# Altium PCB PCB1.PcbDoc (part 2 of 2)
Units mil, origin at the board's own origin, x right, y up, seen from the top; angles counter-clockwise.
Board outline 2955 x 1595 mil, 2 copper layers (Top Layer, Bottom Layer); 109 components, 71 nets, 326 pads, 182 vias.
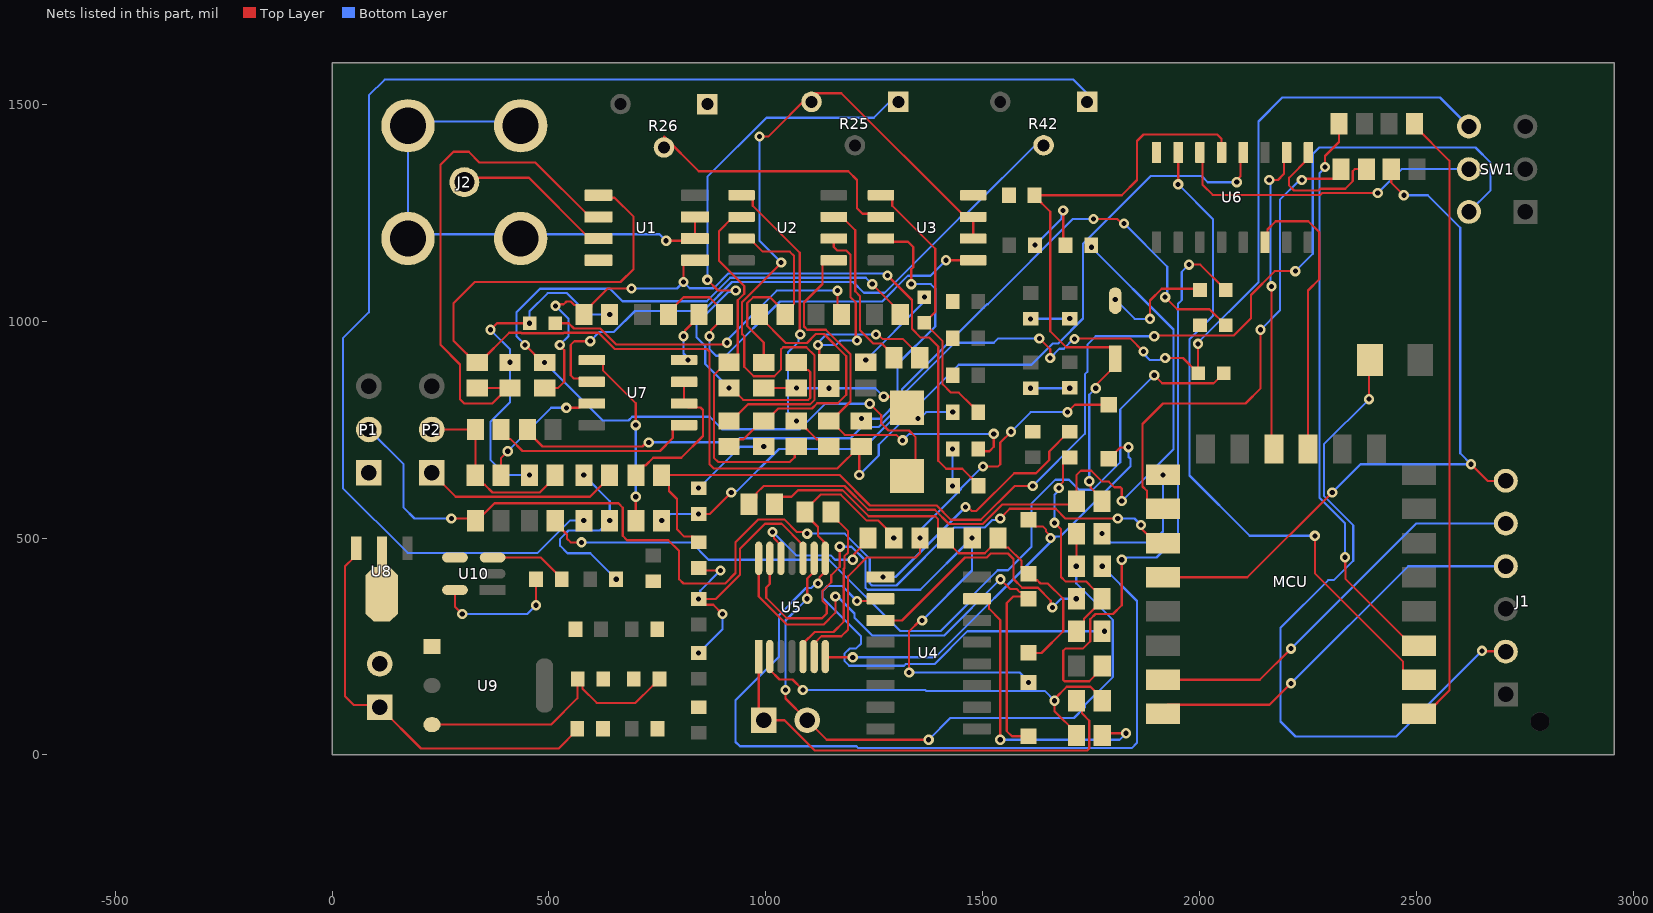
[diagram p2: the nets of this part, all layers, seen from the top]

## Via types
v1: diameter 23.62, hole 11.81, Top Layer to Bottom Layer, 182 vias

## Nets (pads, with @x,y where several pads share a name; then routed paths per layer and width w, separated by ;. In a path a pad name is that pad's centre, name@x,y a point inside that pad or via, vN(x,y) a via of type N, cw(c..) or ccw(c..) an arc to the next point about the centre after c; other vN are vias at no path point) (continued)
A_OUT: C30.1 R48.1 SW1.6 | length 2942.6
  Top Layer w5: C30.1@845,490 831.75,503.25 811.75,503.25 795,520 795,590 776.71,608.29 776.71,627.81 R48.1@759.53,645 1170,645 1240,575 1393.28,575 1426.18,542.11 1495.39,542.11 1573.28,620 v1(1615,620) ; v1(1895,965) 1896.75,966.75 2078.38,966.75 2117.69,1006.06 2117.69,1060 2172.69,1115 v1(2220,1115)
  Bottom Layer w5: v1(1615,620) 1735,740 1735,877.5 1740.69,883.19 1740.69,945.69 1760,965 v1(1895,965) ; v1(2220,1115) 2260,1155 2260,1385 2275,1400 2635,1400 2670,1365 2670,1301.5 SW1.6@2620.08,1251.57
ADC: MCU.2 U6.7 | length 1587.2
  Top Layer w5: v1(1950,1315) U6.7@1950,1388.35 ; v1(2265,505) 2265,418.57 2468.41,215.16 2468.41,194.27 2489.53,173.15 MCU.2@2505.28,173.15
  Bottom Layer w5: v1(1950,1315) 2030.36,1234.64 2030.36,1012.2 1976.16,958 1976.16,643.84 2115,505 v1(2265,505)
D_OUT: C29.1 LED_R1.2 R44.1 SW1.4 | length 2691.2
  Top Layer w5: R44.1@759.53,540 v1(760,540) ; v1(845,555) 870,555 v1(920,605) ; v1(1630,960) 1655,935 v1(1655,915) ; v1(1711.15,958.85) 1712.31,960 1839.31,960 1869.31,930 v1(1870,930) ; v1(1920,915) 1960.94,915 1995.48,880.47 v1(1995.48,947.44)
  Bottom Layer w5: v1(760,540) 764.44,540 779.44,555 v1(845,555) ; v1(920,605) 923.56,608.56 933.56,608.56 1030,705 1223.28,705 1323.35,805.07 1323.35,838.35 1435,950 1525,950 1535,960 v1(1630,960) ; v1(1655,915) 1676.24,936.24 1686.24,936.24 1708.85,958.85 v1(1711.15,958.85) ; v1(1870,930) 1870,925 1885,910 1907.76,910 1909.2,911.44 1916.44,911.44 v1(1920,915) ; v1(1995.48,947.44) 1995.48,950 2135,1089.53 2135,1460 2190,1515 2553.5,1515 SW1.4@2620.08,1448.43
DOUT: C4.1 LED_R.2 U3.1 | length 635.3
  Top Layer w5: U3.1@1265,1290 1281.69,1290 1291,1280.69 1291,1265.75 1390,1166.75 1390,1020.94 LED_R.2@1365,995.94 1407.22,953.72 1407.22,854.18 1426.4,835 1444.53,835 1474.31,805.22 1476.28,805.22 1489.53,791.97 C4.1@1489.53,790
DTR: J1.6 MCU.18 R3.2 | length 1712.1
  Top Layer w5: MCU.18@1914.72,409.37 2109.37,409.37 v1(2305,605) ; R3.2@2440.94,1350 2440.94,1319.06 v1(2470,1290) ; v1(2625,670) 2663.94,631.06 J1.6@2714.33,631.06
  Bottom Layer w5: v1(2305,605) 2370,670 v1(2625,670) 2600,694.96 2600,1215 2525,1290 v1(2470,1290)
GND: C1.1 C2.2 C3.1 C4.2 C5.2 C6.2 C7.2 C8.2 C10.1 C11.2 C12.2 C13.2 C14.2 C15.2 C16.2 C17.2 C18.2 C19.2 C20.2 C21.2 C22.2 C24.2 C25.2 C26.2 C27.2 C28.2 C29.2 C30.2 D1.2 D6.2 J1.2 LED_G.2 LED_R2.2 LED_R3.2 MCU.15 P1.1 P3.2 R4.2 R6.1 R8.2 R10.1 R13.1 R15.1 R16.1 R19.1 R26.1 R33.1 R43.1 R46.2 R47.2 U1.4 U3.8 U5.10 U6.1 U6.8 U7.8 U8.2 U9.1 U10.4 | length 5656.1
  Top Layer w5: v1(365,980) 380,995 v1(455,995) ; v1(580,645) R47.2@580.47,645 ; R8.2@639.53,1015 v1(640,1015) ; v1(810,965) 813.56,968.56 813.56,978.17 845.47,1010.08 R10.1@845.47,1015 ; C30.2@845,430.94 850.94,425 v1(895,425) ; C29.2@845,614.53 v1(845,615) ; v1(900,325) 878.72,346.28 858.25,346.28 v1(845,359.53) 884.53,359.53 940,415 940,475 997.89,532.89 1036.11,532.89 1085.59,483.41 U5.10@1085.59,453.2 ; R13.1@995,845.47 v1(1070,845.47) ; v1(1271.42,825.69) 1299.31,825.69 D1.2@1325,800 v1(1350,775) ; v1(1430,705) C3.1@1430.47,705 ; v1(1610,845) C10.1@1610,845.47 ; v1(1610,1005) C12.2@1610,1005.47 ; v1(1685,1255) 1685,1180.47 C15.2@1690.47,1175 ; v1(1885,1005) 1885,1047.31 1912,1074.31 1997.83,1074.31 LED_R3.2@2000.47,1071.67 ; MCU.15@1914.72,645.59 1914.72,645.28 v1(1915,645) ; U6.1@2250,1388.35 2250,1374.57 2205.69,1330.26 2205.69,1312 2217,1300.69 2273.79,1300.69 2278.11,1305 2334.9,1305 2352.33,1322.43 2352.33,1345.46 2356.87,1350 R4.2@2384.06,1350 ; v1(2390,820) 2390,908.12 C1.1@2391.88,910 ; v1(2650,240) 2650.93,239.07 2704.07,239.07 J1.2@2705,238.15
  Bottom Layer w5: v1(365,980) 410,935 v1(410,905) 410,812.48 365,767.48 365,680 400,645 v1(455,645) ; v1(455,995) 455,1022.31 497,1064.31 541.33,1064.31 590.64,1015 v1(640,1015) ; v1(580,645) 640,585 v1(640,540) 617.22,517.22 544.91,517.22 525.69,498 525.69,482 542.69,465 595,465 v1(655,405) ; v1(810,965) 810,925.04 820,915.04 v1(820,910) ; v1(845,235) 900,290 v1(900,325) ; v1(845,359.53) 848.56,363.09 848.56,378.56 v1(895,425) ; v1(845,615) 940.47,710.47 v1(995,710.47) ; v1(1070,845.47) 1070.24,845.24 1144.76,845.24 v1(1145,845) 1252.11,845 v1(1271.42,825.69) ; v1(1350,775) 1354.44,775 1369.44,790 v1(1430.47,790) ; v1(1430,620) v1(1430,705) ; v1(1610,845) v1(1700,845) ; v1(1610,1005) 1610.24,1005.24 1699.76,1005.24 v1(1700,1005.47) ; v1(1620,1175) 1681.44,1236.44 1681.44,1251.44 v1(1685,1255) ; v1(1774.53,510) 1794.53,490 1890,490 1915,515 v1(1915,645) ; v1(1805,1050) 1850,1005 v1(1885,1005) ; v1(2390,820) 2285.69,715.69 2285.69,597 2353.59,529.11 2353.59,447.73 2308.72,402.86 2295.55,402.86 2185.69,293 2185.69,77 2220.21,42.48 2452.48,42.48 v1(2650,240)
IN1: P4.1 R28.2 U5.1 | length 1078.8
  Top Layer w5: U5.1@983.23,226.8 983.23,91.77 P4.1@995,80 1042.64,80 1112.26,10.37 1740.37,10.37 1745,15 1745,79.06 1728.23,95.82 1728.23,112.71 R28.2@1715.94,125 R28.2@1733.13,107.81
NetC2_1: C2.1 R7.1 R8.1 U1.5 | length 1766.7
  Top Layer w5: R7.1@490,845.47 520.47,845.47 535,860 535,932.76 525,942.76 v1(525,945) ; v1(515,1035) 518.56,1038.56 533.82,1038.56 540.26,1045 550.47,1045 558.37,1037.11 563.29,1037.11 580.47,1019.92 R8.1@580.47,1015 597.66,1032.19 597.66,1037.11 635.55,1075 v1(690,1075) ; v1(810,1090) 810,1129.7 820.3,1140 U1.5@836.22,1140 ; v1(1280,1105) 1336.71,1048.29 1336.71,982.13 1357.11,961.74 1376.83,961.74 1397.22,941.34 1397.22,677.78 1415.3,659.7 1452.27,659.7 1490,621.97 C2.1@1490,620
  Bottom Layer w5: v1(515,1035) 545,1005 545,965 v1(525,945) ; v1(690,1075) 795,1075 v1(810,1090) 824.31,1075.69 879.49,1075.69 913.61,1109.81 1270.15,1109.81 1274.96,1105 v1(1280,1105)
NetC3_2: C3.2 R18.2 U2.5 | length 973.2
  Top Layer w5: R18.2@1145,769.53 R18.2@1149.92,769.53 ; U2.5@1156.3,1140 1139.61,1140 1130.3,1130.69 1130.3,1085.19 1087.81,1042.71 1087.81,987.29 1095.1,980 1138.1,980 1195,923.1 1195,814.61 R18.2@1149.92,769.53 ; v1(1315,725) 1313.01,725 1300.35,737.66 1181.79,737.66 R18.2@1149.92,769.53 ; C3.2@1489.53,705 1494.53,700 1515,700 1525,710 v1(1525,740)
  Bottom Layer w5: v1(1315,725) 1330,740 v1(1525,740)
NetC9_1: C9.1 R30.2 R31.2 | length 514.9
  Top Layer w5: v1(1665,535) 1680,520 1680,410 1690,400 1737.44,400 1755.34,382.11 1757.34,382.11 1774.53,364.92 R31.2@1774.53,360 1774.53,355.08 1732.66,313.21 1732.66,302.19 R30.2@1715.47,285 ; v1(1675,615) 1675,620.04 1684.78,629.82 1684.78,672.22 1698.03,685.47 C9.1@1700,685.47
  Bottom Layer w5: v1(1665,535) 1665,599.96 1675,609.96 v1(1675,615)
NetC9_2: C9.2 U4.9 | length 587.8
  Top Layer w5: v1(1460,571.42) 1465.04,571.42 1474.35,562.11 1485,562.11 1572.2,649.31 1622.44,649.31 1652.7,679.58 1652.7,699.2 1698.03,744.53 C9.2@1700,744.53
  Bottom Layer w5: v1(1270,410) 1298.58,410 v1(1460,571.42)
NetC15_1: C15.1 R34.1 R39.2 | length 1770.5
  Top Layer w5: R34.1@960.94,575 977.92,591.98 977.92,602.92 995,620 1180.86,620 1235.86,565 1389.14,565 1422.04,532.11 1499.53,532.11 1544.65,577.22 1707.7,577.22 R39.2@1715.47,585 1715.47,644.72 1725.75,655 1750,655 1775,630 1790,630 1802.89,617.11 1817.07,617.11 1820,614.18 v1(1820,585) ; C15.1@1749.53,1175 1750,1174.53 v1(1750,1170)
  Bottom Layer w5: v1(1750,1170) 1939.31,980.69 1939.31,704.31 v1(1820,585)
NetC16_1: C16.1 D6.1 R39.1 U6.5 | length 1455.7
  Top Layer w5: v1(1745,630.69) 1748.56,627.13 1748.56,615.89 1774.53,589.92 R39.1@1774.53,585 ; v1(1760,845) 1763.56,848.56 1763.56,855.58 1805,897.01 1805,927.42 1792.88,939.53 1691.92,939.53 1655,976.45 1655,1252.09 1619.06,1288.03 C16.1@1619.06,1290 1820,1290 1855,1325 1855,1415 1870,1430 2040,1430 2050,1420 U6.5@2050,1388.35
  Bottom Layer w5: v1(1745,630.69) 1745,830 v1(1760,845)
NetC17_1: C17.1 P3.1 U8.3 | length 957
  Top Layer w5: U8.3@55.94,476.3 55.94,475.94 50,470 50,454.61 30,434.61 30,135 50,115 105,115 P3.1@110,110 205,15 522.44,15 565.47,58.03 C17.1@565.47,60
NetC23_1: C23.1 U10.5 | length 300.4
  Top Layer w5: U10.5@283.35,380.2 283.35,341.65 v1(300,325) ; v1(470,345) C23.1@470,405
  Bottom Layer w5: v1(300,325) 450,325 v1(470,345)
NetC23_2: C23.2 U10.3 | length 180.9
  Top Layer w5: U10.3@370,455 481.02,455 529.06,406.97 C23.2@529.06,405
NetD1_1: D1.1 R7.2 R23.1 | length 2215.6
  Top Layer w5: v1(445,945) 445,944.61 485.08,904.53 v1(490,904.53) ; v1(1239.31,809.45) 1265.61,783.15 1265.61,764.39 1282.34,747.66 1329.65,747.66 1344.31,733 1344.31,661.83 D1.1@1325,642.52 ; v1(1245,1085) 1245,1084.45 1309.53,1019.92 R23.1@1309.53,1015
  Bottom Layer w5: v1(445,945) 425,965 425,1020 479.31,1074.31 640.69,1074.31 669.31,1045.69 863.64,1045.69 917.75,1099.81 1230.19,1099.81 v1(1245,1085) ; v1(490,904.53) 623.84,770.69 683.38,770.69 692,779.31 870.69,779.31 899.31,750.69 1078,750.69 1136.76,809.45 v1(1239.31,809.45)
NetD2_1: D2.1 D5.2 U5.7 | length 1069.2
  Top Layer w5: U5.7@1136.77,226.8 1138.57,225 v1(1200,225) ; D2.1@1605,542.01 1620.22,526.79 1638.21,526.79 1645.05,519.95 1645.05,515.67 1655.69,505.04 v1(1655.69,500) ; D5.2@1790,682.99 1790.98,682.99 1816.38,708.39 1834.66,708.39 v1(1835.69,709.42)
  Bottom Layer w5: v1(1200,225) 1390,225 v1@1660.34,495.34 ; v1(1655.69,500) v1@1660.34,495.34 ; v1(1835.69,709.42) 1835.69,686.84 1840,682.53 1840,665 1678.56,503.56 1668.56,503.56 1665,500 v1@1660.34,495.34
NetD2_2: D2.2 D3.2 R34.2 R37.1 R38.1 | length 1017.2
  Top Layer w5: R34.2@1020,575 R34.2@1020,577.81 1037.19,595 1059.06,595 1074.06,610 1176.72,610 1236.72,550 1390,550 1396.87,543.13 1396.87,517.19 R37.1@1414.06,500 1414.06,495.08 1444.13,465 1504.45,465 R38.1@1534.53,495.08 ; R38.1@1534.53,500 R38.1@1534.53,495.08 ; D3.2@1605,235.98 1605.98,235 1635,235 1685,285 1685,360 1649.78,395.22 1632.78,395.22 1625.23,402.78 1621.2,402.78 1605.98,417.99 1604.02,417.99 1588.8,433.21 1588.8,447.65 1558.56,477.89 1551.71,477.89 R38.1@1534.53,495.08
NetD3_1: D3.1 D4.2 U5.14 | length 1299.9
  Top Layer w5: U5.14@983.23,453.2 983.23,365.32 1047.86,300.69 1133,300.69 1160,327.69 v1(1160,365) ; v1(1540.3,404.7) 1562.22,382.78 1577.22,382.78 1584.77,375.22 1588.8,375.22 D3.1@1599.02,365 ; D4.2@1605,42.99 1567.01,42.99 1555,55 1555,350 1570,365 D3.1@1599.02,365 ; D3.1@1605,360 1600,365 D3.1@1599.02,365
  Bottom Layer w5: v1(1160,365) 1165,365 1203.94,326.06 1203.94,316.06 1244.31,275.69 1411.28,275.69 v1(1540.3,404.7)
NetD4_1: D4.1 R38.2 U5.13 | length 1523.5
  Top Layer w5: U5.13@1008.82,453.2 1008.82,393.89 1000.69,385.76 1000.69,362 1047.69,315 1129.18,315 1140,325.82 1140,345.53 1130.69,354.84 1130.69,378.38 1150.34,398.03 1150.34,414.25 1170,433.9 v1(1170,480) ; v1(1330,190) 1330,285 1355,310 v1(1360,310)
  Bottom Layer w5: v1(1170,480) 1197.31,480 1229.37,447.94 1229.37,385.63 1234.31,380.69 1355.69,380.69 v1(1475,500) 1475,425 v1(1360,310) ; v1(1330,190) 1585,190 1605,170 v1(1605,167.01)
NetD5_1: D5.1 R37.2 U5.6 | length 1070.2
  Top Layer w5: U5.6@1111.18,226.8 1111.18,257.01 1127.75,273.57 1173.57,273.57 1189.31,289.31 1189.31,412 1232.31,455 1345,455 1355,465 v1(1355,500) ; v1(1500,665) 1535,665 1540,670 1540,720 v1(1565,745) ; v1(1695,790) 1712.01,807.01 D5.1@1790,807.01
  Bottom Layer w5: v1(1355,500) 1358.56,503.56 1358.56,521.25 1449.31,612 1449.31,614.31 v1(1500,665) ; v1(1565,745) 1610,790 v1(1695,790)
NetLED_G_1: LED_G.1 R20.1 | length 784.1
  Top Layer w5: LED_G.1@514.52,995 545.58,995 557.68,982.89 618.26,982.89 655.46,945.69 897.76,945.69 898.51,946.44 906.44,946.44 v1(910,950) ; v1(1165,1070) 1165,1024.06 R20.1@1174.06,1015
  Bottom Layer w5: v1(910,950) 910,955 1025,1070 v1(1165,1070)
NetLED_R1_1: LED_R1.1 R41.2 | length 2069.5
  Top Layer w5: R41.2@514.53,540 514.53,535.08 541.44,508.17 541.44,498.56 550,490 v1(575,490) ; v1(1895,875) 1913.25,856.75 2031.75,856.75 LED_R1.1@2055,880
  Bottom Layer w5: v1(575,490) 827.52,490 867.52,450 1145,450 1309.31,285.69 1403,285.69 1468.48,351.17 1468.48,360.2 1533.97,425.69 1558,425.69 1611.66,479.35 1611.66,578.97 1667,634.31 1698.53,634.31 1721.47,611.38 1753,611.38 1816.38,674.76 1816.38,796.38 v1(1895,875)
NetLED_R2_1: LED_R2.1 R50.2 | length 2015.7
  Top Layer w5: R50.2@450.47,750 450.47,745.08 484.86,710.69 715.65,710.69 724.96,720 v1(730,720) ; v1(1755,1235) 1809.96,1235 1819.96,1225 v1(1825,1225) ; v1(1920,1055) 1947.66,1027.34 2022.18,1027.34 LED_R2.1@2059.52,990
  Bottom Layer w5: v1(730,720) 730.47,720.47 930.47,720.47 939.78,729.78 1194.78,729.78 1220.69,755.69 1259.83,755.69 1313.35,809.21 1313.35,842.49 1509.6,1038.75 1511.06,1038.75 1707.31,1235 v1(1755,1235) ; v1(1825,1225) 1925,1125 1925,1057.93 1922.07,1055 v1(1920,1055)
NetLED_R3_1: LED_R3.1 R29.1 | length 1385.7
  Top Layer w5: R29.1@1775,205 1775,200.08 1744.92,170 1687.93,170 1685,172.93 1685,240 1690,245 1730.37,245 1747.34,261.97 1747.34,312.71 1759.63,325 1800,325 1820,345 v1(1820,450) ; v1(1975,1130) 2001.2,1130 LED_R3.1@2059.52,1071.67
  Bottom Layer w5: v1(1820,450) 1823.56,453.56 1830.8,453.56 1832.24,455 1900,455 1949.31,504.31 1949.31,1039.31 1958.22,1048.22 1958.22,1113.22 v1(1975,1130)
NetLED_R_1: LED_R.1 R21.2 | length 205.9
  Top Layer w5: R21.2@1230,905 v1(1230,910)
  Bottom Layer w5: v1(1230,910) 1361.44,1041.44 1361.44,1051.44 v1(1365,1055)
NetMCU_3: MCU.3 R2.1 | length 1326
  Top Layer w5: v1(2288.5,1355) 2288.5,1380.48 2320.47,1412.45 R2.1@2320.47,1455 ; v1(2334.27,455.73) 2335,455 2335,427.31 2335.24,427.07 2335.24,406.18 2489.53,251.89 MCU.3@2505.28,251.89
  Bottom Layer w5: v1(2288.5,1355) 2288.5,1353.32 2275.69,1340.51 2275.69,592.86 2334.27,534.27 v1(2334.27,455.73)
NetMCU_16: MCU.16 R4.1 | length 1156.3
  Top Layer w5: MCU.16@1914.72,566.85 1898.98,566.85 1877.85,587.97 1877.85,608.86 1867.85,618.86 1867.85,762.85 1915,810 2105,810 2140,845 v1(2140,980) ; v1(2235,1325) 2237.89,1327.89 2307.81,1327.89 2325,1345.08 R4.1@2325,1350
  Bottom Layer w5: v1(2140,980) 2184.31,1024.31 2184.31,1279.31 2230,1325 v1(2235,1325)
NetMCU_17: MCU.17 P1.2 R40.2 | length 2456.6
  Top Layer w5: v1(275,545) R40.2@325.47,545 ; R40.2@330.47,540 R40.2@325.47,545 ; v1(1095,510) 1091.44,513.56 1071.44,513.56 1042.11,542.89 982.89,542.89 930,490 930,419.14 905.86,395 810,395 800,405 800,470 775,495 680,495 670,505 670,570 660,580 374.63,580 339.63,545 R40.2@325.47,545 ; v1(1539.87,545.13) 1561.96,567.22 1667.78,567.22 1690,545 v1(1810.69,545) ; v1(1864.31,530) 1867.87,526.44 1867.87,519.21 1898.98,488.11 MCU.17@1914.72,488.11
  Bottom Layer w5: P1.2@85,750 165,670 165,570 190,545 v1(275,545) ; v1(1095,510) 1181.45,510 1239.37,452.09 1239.37,395.63 1244.31,390.69 1300.69,390.69 1434.31,524.31 1504.31,524.31 1521.57,541.57 1536.3,541.57 v1(1539.87,545.13) ; v1(1810.69,545) 1849.31,545 v1(1864.31,530)
NetP2_1: P2.1 R47.1 | length 455.9
  Top Layer w5: P2.1@230,650 285,595 594.45,595 639.53,640.08 R47.1@639.53,645
NetP2_2: P2.2 R45.2 R46.1 R49.2 | length 428.6
  Top Layer w5: P2.2@230,750 R49.2@330.47,750 330.47,645.47 R45.2@330,645 330,640.08 347.19,622.89 352.11,622.89 370,605 478.98,605 514.06,640.08 R46.1@514.06,645
NetP4_2: P4.2 R32.2 R33.2 U5.9 | length 1572.1
  Top Layer w5: v1(1045,150) 1045,130 P4.2@1095,80 1140,35 v1(1375,35) ; v1(1095,360) 1095,406.81 1111.18,422.99 U5.9@1111.18,453.2 ; R32.2@1715.47,435.47 R33.2@1715.47,510
  Bottom Layer w5: v1(1045,150) 1045,310 v1(1095,360) ; v1(1375,35) 1425,85 1710,85 1735,110 1735,115 1799.31,179.31 1799.31,311.33 1715,395.64 v1(1715,435)
NetR5_1: R5.1 R6.2 U1.2 | length 1196
  Top Layer w5: R5.1@335,845.47 405.08,845.47 369.61,810 305,810 295,820 295,900 250,945 250,1360 280,1390 315,1390 340,1365 469.09,1365 594.09,1240 U1.2@613.78,1240
NetR9_1: R9.1 R10.2 U3.5 | length 967.7
  Top Layer w5: R9.1@775,1015 775,1019.92 810.08,1055 869.45,1055 904.53,1019.92 R10.2@904.53,1015 904.53,1010.08 873.56,979.11 873.56,968.56 v1(870,965) ; v1(1415,1140) U3.5@1477.6,1140
  Bottom Layer w5: v1(870,965) 870,935 885,920 907.5,920 1032.5,1045 1267.69,1045 1327,1104.31 1379.31,1104.31 v1(1415,1140)
NetR11_1: R11.1 R14.1 R15.2 | length 667.5
  Top Layer w5: R14.1@915,710.47 932.19,727.66 948.21,727.66 990.08,769.53 999.92,769.53 1028.68,798.29 1106,798.29 1118.21,810.5 1165.4,810.5 1185,830.1 1185,918.95 1133.95,970 1115,970 1094.57,949.57 1045.99,949.57 985.47,1010.08 R11.1@985.47,1015
NetR11_2: R11.2 R13.2 U2.3 | length 541.8
  Top Layer w5: U2.3@943.7,1190 962.4,1190 992.4,1160 1055,1160 1065,1150 1065,1095.2 1065,1040.04 1062.07,1037.11 1061.71,1037.11 R11.2@1044.53,1019.92 ; R13.2@995,904.53 995,950.57 957.11,988.47 957.11,1041.53 970.57,1055 1009.45,1055 R11.2@1044.53,1019.92 ; R11.2@1044.53,1015 R11.2@1044.53,1019.92
NetR12_1: R12.1 R16.2 R25.1 | length 1439.1
  Top Layer w5: v1(865,1095) 889.5,1070.5 v1(930.48,1070.5) ; v1(915,845.94) 919.92,845.94 947.58,818.29 1097.71,818.29 1102.11,822.68 1102.11,882.7 1097.47,887.34 1087.19,887.34 R16.2@1070,904.53
  Bottom Layer w5: v1(865,1095) 865,1332.31 1001.13,1468.44 1248.44,1468.44 R25.1@1305,1525 ; v1(915,845.94) 860,900.94 860,942.5 840,962.5 840,1000 853.23,1013.23 859.46,1013.23 913.16,1066.93 926.91,1066.93 v1(930.48,1070.5)
NetR12_2: R12.2 R17.1 U2.2 | length 866.1
  Top Layer w5: U2.2@943.7,1240 925,1240 891.54,1206.54 891.54,1139.41 950,1080.95 950,1062.71 935,1047.71 935,922.19 917.81,905 R12.2@915,905 910.08,905 880,874.92 880,685 890,675 1055,675 1066.22,686.22 1066.22,706.69 R17.1@1070,710.47
NetR14_2: R14.2 R25.3 U3.6 U3.7 | length 1845.9
  Top Layer w5: R14.2@915,769.53 919.92,769.53 958.68,808.29 1101.86,808.29 1112.11,818.54 1112.11,920.58 1093.12,939.57 1039.57,939.57 1035,935 1035,888.59 1019.07,872.66 971.97,872.66 950,894.63 950,965 945,970 945,1043.57 1035,1133.57 v1(1035,1135) ; v1(985,1425) 1005,1425 1105,1525 1173.9,1525 1458.9,1240 U3.7@1477.6,1240 U3.6@1477.6,1190
  Bottom Layer w5: v1(985,1425) 985,1185 v1(1035,1135)
NetR17_2: R17.2 R18.1 U2.1 | length 700
  Top Layer w5: U2.1@943.7,1290 960.39,1290 969.7,1280.69 969.7,1265.75 1077.81,1157.64 1077.81,969.98 v1(1078.92,968.88) ; R17.2@1074.92,769.53 1116.79,727.66 1127.81,727.66 R18.1@1145,710.47
  Bottom Layer w5: v1(1070,770) 1050.69,789.31 1050.69,927.75 1075.35,952.42 1075.35,965.31 v1(1078.92,968.88)
NetR19_2: R19.2 R24.1 U2.6 | length 690.4
  Top Layer w5: v1(1120,945) 1122.89,942.11 1122.89,921.24 1140.08,904.06 R19.2@1145,904.06 ; U2.6@1156.3,1190 1156.3,1170.69 1164.77,1162.22 1185.84,1162.22 1195,1153.05 1195,1055 1206.93,1043.07 1206.93,958.07 v1(1210,955) ; v1(1253.83,968.86) 1258.87,968.86 1269.5,958.23 1316.22,958.23 1354.53,919.92 R24.1@1354.53,915
  Bottom Layer w5: v1(1210,955) 1171.78,955 1161.78,945 v1(1120,945) 1120,950 1138.86,968.86 v1(1253.83,968.86)
NetR22_2: R22.2 U3.3 | length 625.7
  Top Layer w5: U3.3@1265,1190 1272.3,1182.7 1327.3,1182.7 1329.98,1180.02 1339.31,1170.69 1339.31,1123.67 1335,1119.36 v1(1335,1085)
  Bottom Layer w5: v1(1220,775) 1265,775 1303.35,813.35 1303.35,900.85 1390,987.5 1390,1075 1380,1085 v1(1335,1085)
NetR26_2: R26.2 U3.2 | length 614.8
  Top Layer w5: 765,1425.2 845.2,1345 1190,1345 1210,1325 1210,1260 1222.7,1247.3 1257.7,1247.3 U3.2@1265,1240
NetR27_2: R27.2 R28.1 U5.2 | length 958.9
  Top Layer w5: U5.2@1008.82,226.8 1008.82,196.59 1031.44,173.97 1061.03,173.97 v1(1085,150) ; R27.2@1715.94,45 1715.94,49.92 1665,100.87 1665,128.95 1693.15,157.11 1747.81,157.11 1775,129.92 R28.1@1775,125
  Bottom Layer w5: v1(1085,150) 1366.8,150 1369.1,147.7 1642.3,147.7 v1(1665,125)
NetR30_1: R30.1 U4.10 | length 1018.6
  Top Layer w5: v1(1210,355) 1258.78,355 U4.10@1263.78,360 ; R30.1@1774.53,285 v1(1780,285)
  Bottom Layer w5: v1(1210,355) 1175.69,389.31 1142,389.31 1130.69,378 1130.69,361.81 1219.31,273.19 1219.31,257 1207.31,245 1192.69,245 1180.69,233 1180.69,217 1192,205.69 1318.38,205.69 1322,209.31 1388.45,209.31 1464.14,285 v1(1780,285)
NetR31_1: R31.1 U4.11 | length 609.1
  Top Layer w5: U4.11@1263.78,310 1313.55,310 1458.55,455 1508.59,455 1517.9,464.31 1558,464.31 1570.6,451.71 1570.6,405.37 1590.75,385.22 1626.81,385.22 1656.44,355.59 1656.44,343.56 v1(1660,340)
  Bottom Layer w5: v1(1660,340) 1680,360 v1(1715,360)
NetR32_1: R32.1 R35.2 R36.2 U5.8 | length 2295.7
  Top Layer w5: v1(1120,395) 1123.56,398.56 1123.56,409.79 1133.64,419.86 1136.77,419.86 U5.8@1136.77,453.2 1136.77,486.54 1133.02,490.3 1133.02,491.98 1120,505 1120,525.55 1090.47,555.08 R35.2@1090.47,560 1090.47,564.92 1125.55,600 1172.57,600 1232.57,540 1259.45,540 1294.53,504.92 v1(1294.53,500) ; v1(1775,435) R32.1@1775,439.92
  Bottom Layer w5: v1(1120,395) 1114.96,395 1104.68,384.72 1092.41,384.72 1030,322.31 1030,226.15 930,126.15 930,30 940,20 1208.62,20 1212.93,15.69 1842.76,15.69 1855,27.93 1855,355 v1(1775,435)
NetR35_1: R35.1 U5.5 | length 418.1
  Top Layer w5: U5.5@1085.59,226.8 1085.59,257.01 1112.16,283.57 1155.64,283.57 1179.31,307.24 1179.31,429.07 1180.69,430.45 1180.69,458 1189.31,466.62 1189.31,515.3 1149.53,555.08 R35.1@1149.53,560
NetR36_1: R36.1 U5.12 | length 344.4
  Top Layer w5: v1(1015,513.58) 1018.56,510.02 1018.56,499.26 1034.41,483.41 U5.12@1034.41,453.2 ; v1(1200,450) 1203.56,453.56 1203.56,463.17 1235.47,495.08 R36.1@1235.47,500
  Bottom Layer w5: v1(1015,513.58) 1016.42,513.58 1070,460 1149.14,460 1159.14,450 v1(1200,450)
NetR42_1: R42.1 R43.2 | length 3260.5
  Bottom Layer w5: v1(580,540) 548.14,540 473.83,465.69 174.31,465.69 25,615 25,960 85,1020 85,1520 121.32,1556.32 1708.68,1556.32 R42.1@1740,1525
NetR42_2: R42.2 U7.2 | length 1434.3
  Top Layer w5: v1(595,953.58) 558.58,953.58 550,945 550,875 557.7,867.3 591.4,867.3 U7.2@598.7,860
  Bottom Layer w5: v1(595,953.58) 616.42,975 650,975 698.23,1023.23 855.32,1023.23 921.9,1089.81 1200.82,1089.81 1225.63,1065 1273.55,1065 1446.65,1238.1 1453.1,1238.1 R42.2@1640,1425
NetR44_2: R44.2 U7.1 | length 421.9
  Top Layer w5: U7.1@598.7,910 615.39,910 624.7,900.69 624.7,885.75 700,810.45 v1(700,760) ; v1(700,595) 700,540.47 R44.2@700.47,540
  Bottom Layer w5: v1(700,595) v1(700,760)
NetR45_1: R45.1 U7.3 | length 300.9
  Top Layer w5: R45.1@389.06,645 389.06,684.06 v1(405,700) ; v1(540,800) 567.76,800 568.45,800.69 570.69,800.69 580,810 U7.3@598.7,810
  Bottom Layer w5: v1(405,700) 505,800 v1(540,800)
NetR48_2: R48.2 U7.6 U7.7 | length 354.6
  Top Layer w5: R48.2@700.47,645 700.47,649.92 717.66,667.11 722.58,667.11 740.47,685 805,685 855,735 855,795 849.31,800.69 820.61,800.69 U7.6@811.3,810 U7.7@811.3,860
NetR49_1: R49.1 U7.5 | length 481.6
  Top Layer w5: R49.1@389.53,750 389.53,745.08 406.71,727.89 411.63,727.89 438.84,700.69 755.69,700.69 785.3,730.3 785.3,750.69 794.61,760 U7.5@811.3,760
p_AOUT: R5.2 R22.1 U1.1 U6.4 | length 3468.4
  Top Layer w5: U1.1@613.78,1290 619.61,1284.17 650.83,1284.17 695,1240 695,1120 665,1090 329.21,1090 279.61,1040.39 279.61,955 309.61,925 309.96,925 312.89,922.07 312.89,921.71 330.08,904.53 339.92,904.53 408.29,972.89 435.47,972.89 436.61,971.75 533.38,971.75 534.52,972.89 614.11,972.89 651.32,935.69 864.31,935.69 870,930 870,670 880,660 1164.61,660 1215.08,710.47 R22.1@1220,710.47 1215,705.47 v1(1215,645) ; v1(2085,1320) 2085,1325.04 2093.62,1333.66 2093.62,1381.97 U6.4@2100,1388.35
  Bottom Layer w5: v1(1215,645) 1260,690 1260,715 1444.31,899.31 1612,899.31 1661.08,948.39 1673.39,948.39 1730.69,1005.69 1730.69,1178 1887,1334.31 2003.83,1334.31 2018.14,1320 v1(2085,1320)
PH+: J2.1 U1.3 | length 366.9
  Top Layer w5: J2.1@304.92,1330.08 454.02,1330.08 594.09,1190 U1.3@613.78,1190
PH-: J2.2 J2.3 J2.4 J2.5 U1.6 U1.7 | length 1239.3
  Top Layer w5: v1(770,1185) 831.22,1185 U1.6@836.22,1190 U1.7@836.22,1240
  Bottom Layer w5: J2.2@434.84,1460 175,1460 175,1200.16 434.84,1200.16 754.84,1200.16 v1(770,1185)
PIN7: R27.1 U4.7 | length 711
  Top Layer w5: U4.7@1486.22,360 1503.99,360 1514.28,349.7 1514.28,336.7 1540,310.98 v1(1540,35) ; R27.1@1775,45 1780,50 v1(1830,50)
  Bottom Layer w5: v1(1540,35) 1815,35 v1(1830,50)
RST: MCU.1 R1.2 | length 1432
  Top Layer w5: R1.2@2494.53,1455 2494.53,1450.08 2575,1369.61 2575,148.39 2521.02,94.41 MCU.1@2505.28,94.41
RX: J1.5 MCU.21 | length 939.5
  Top Layer w5: MCU.21@1914.72,173.15 2138.15,173.15 v1(2210,245)
  Bottom Layer w5: v1(2210,245) 2498.43,533.43 J1.5@2705,533.43
S0: MCU.11 U6.14 | length 680
  Top Layer w5: U6.14@2150,1181.65 2155.78,1187.43 2155.78,1210.78 2175,1230 2250,1230 2275,1205 2275,1096.08 2249.37,1070.45 MCU.11@2249.37,704.65
S1: MCU.12 U6.2 | length 716.4
  Top Layer w5: v1(2160,1325) 2179.96,1325 2193.62,1338.66 2193.62,1381.97 U6.2@2200,1388.35 ; v1(2165,1080) 2165,710.28 MCU.12@2170.63,704.65
  Bottom Layer w5: v1(2160,1325) 2162.5,1322.5 2162.5,1082.5 v1(2165,1080)
Senser_OUT: SW1.5 U6.6 | length 725.1
  Top Layer w5: U6.6@2000,1388.35 2006.38,1381.97 2006.38,1313.62 2029.31,1290.69 2277.94,1290.69 2282.25,1295 v1(2410,1295)
  Bottom Layer w5: v1(2410,1295) 2465,1350 SW1.5@2620.08,1350
t_AOUT: R24.2 U2.7 | length 405.3
  Top Layer w5: U2.7@1156.3,1240 1175,1240 1205.69,1209.31 1205.69,1068.56 1216.93,1057.32 1216.93,978.45 1247.16,948.23 1267.17,948.23 1295.47,919.92 R24.2@1295.47,915
TX: J1.4 MCU.22 | length 941.3
  Top Layer w5: MCU.22@1914.72,94.41 1914.72,95.28 1910,100 1925.53,115.53 2160.53,115.53 v1(2210,165)
  Bottom Layer w5: v1(2210,165) 2480,435 J1.4@2705,435
VCC: C19.1 C20.1 U9.3 | length 628.8
  Top Layer w5: U9.3@230.28,69.84 504.84,69.84 565.38,130.38 C19.1@565.38,164.06 ; C19.1@565.94,164.06 573.02,164.06 577.29,159.78 577.29,152.71 610,120 699.53,120 739.31,159.78 741.28,159.78 754.53,173.03 C20.1@754.53,175
pads on no net: J1. MCU.4 MCU.5 MCU.6 MCU.7 MCU.9 MCU.10 MCU.13 MCU.14 MCU.19 MCU.20 R25.2 SW1.1 SW1.2 SW1.3 U2.4 U2.8 U4.1 U4.2 U4.3 U4.4 U4.5 U4.6 U4.13 U4.14 U4.15 U5.3 U6.3 U6.9 U6.10 U6.11 U6.12 U6.13 U6.15 U9.4

## Polygon pours and split planes (outlines as drawn)
GND on Top Layer "GND_L01_P000" (solid, pour order 0): 1820,1420 1788.5,1385 905,1385 905,1470 805,1570 600,1570 550,1570 550,1152.1 45,744.89 45,20 2735,20 2830,115 2830,1355 2765,1420 2470,1420 2765,1420 2470,1420

## Other copper
Top Layer:
  region net -3.3V: 1047.5,385 1032.5,370 1045.19,370
  region net 5V: 1375,875 1360,875 1380,855 1385.71,855
  region net 5V: 1375,869.4 1369.4,875 1360,875

## Silkscreen, mask and mechanical layers (free items; w line width, h text height)
Mechanical 13:
  lines w10: 0,0 2955,0 2955,60 2955,1595 2840,1595 0,1595 0,0